# EAGLE board witch-dekatron1 (EAGLE 6.4)
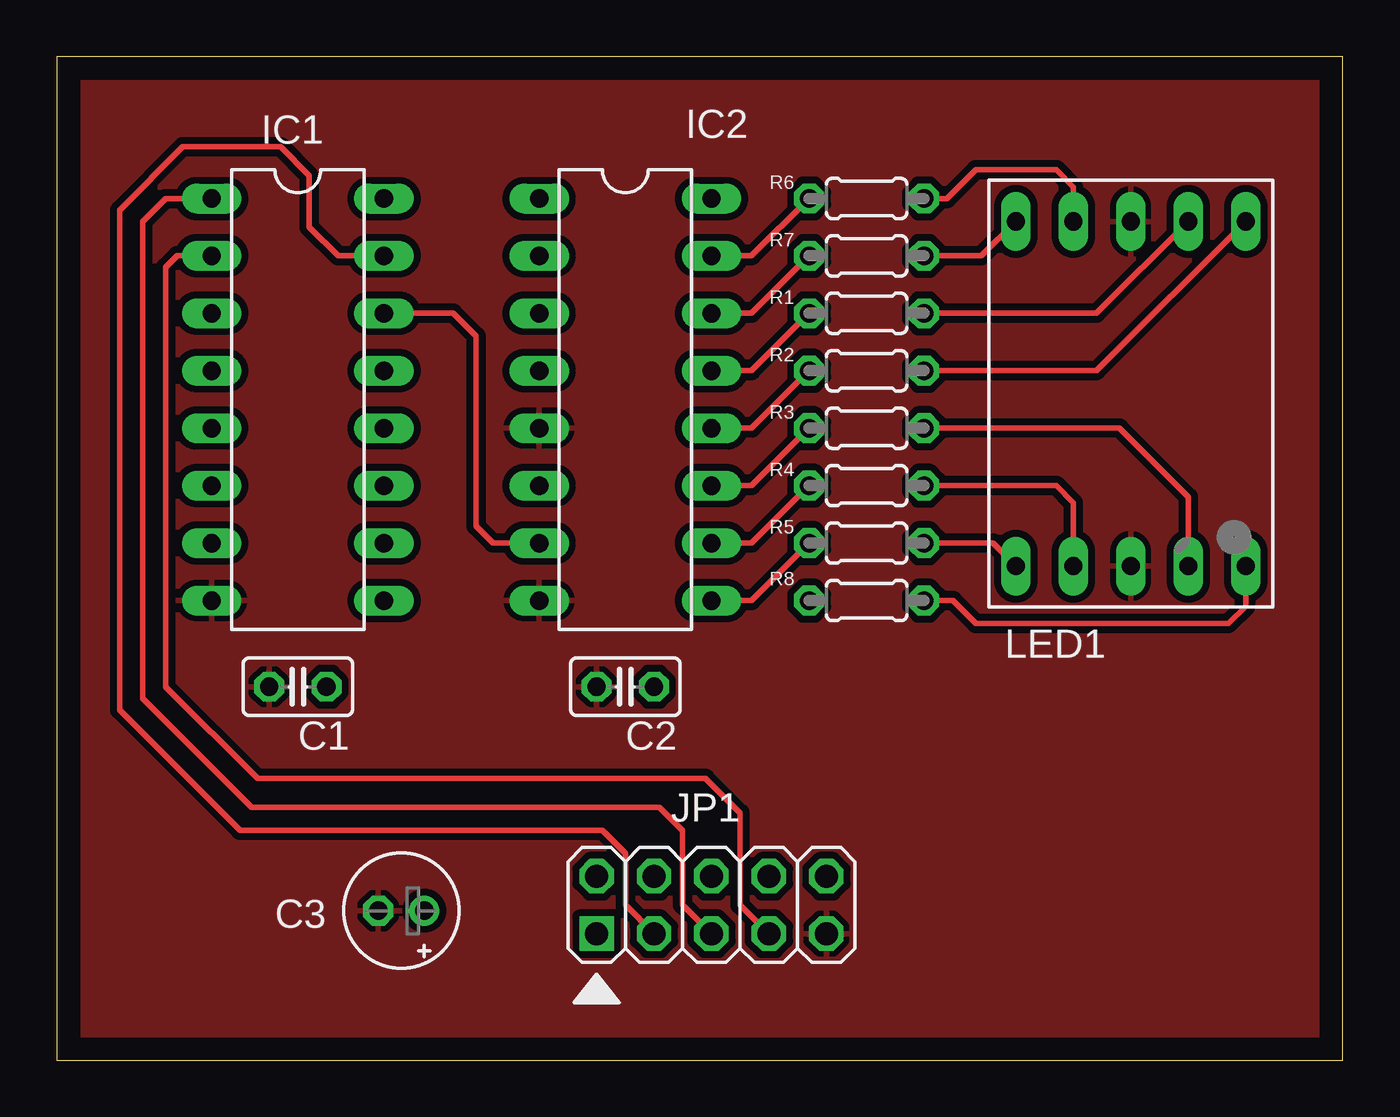
[diagram p0: board, top side]
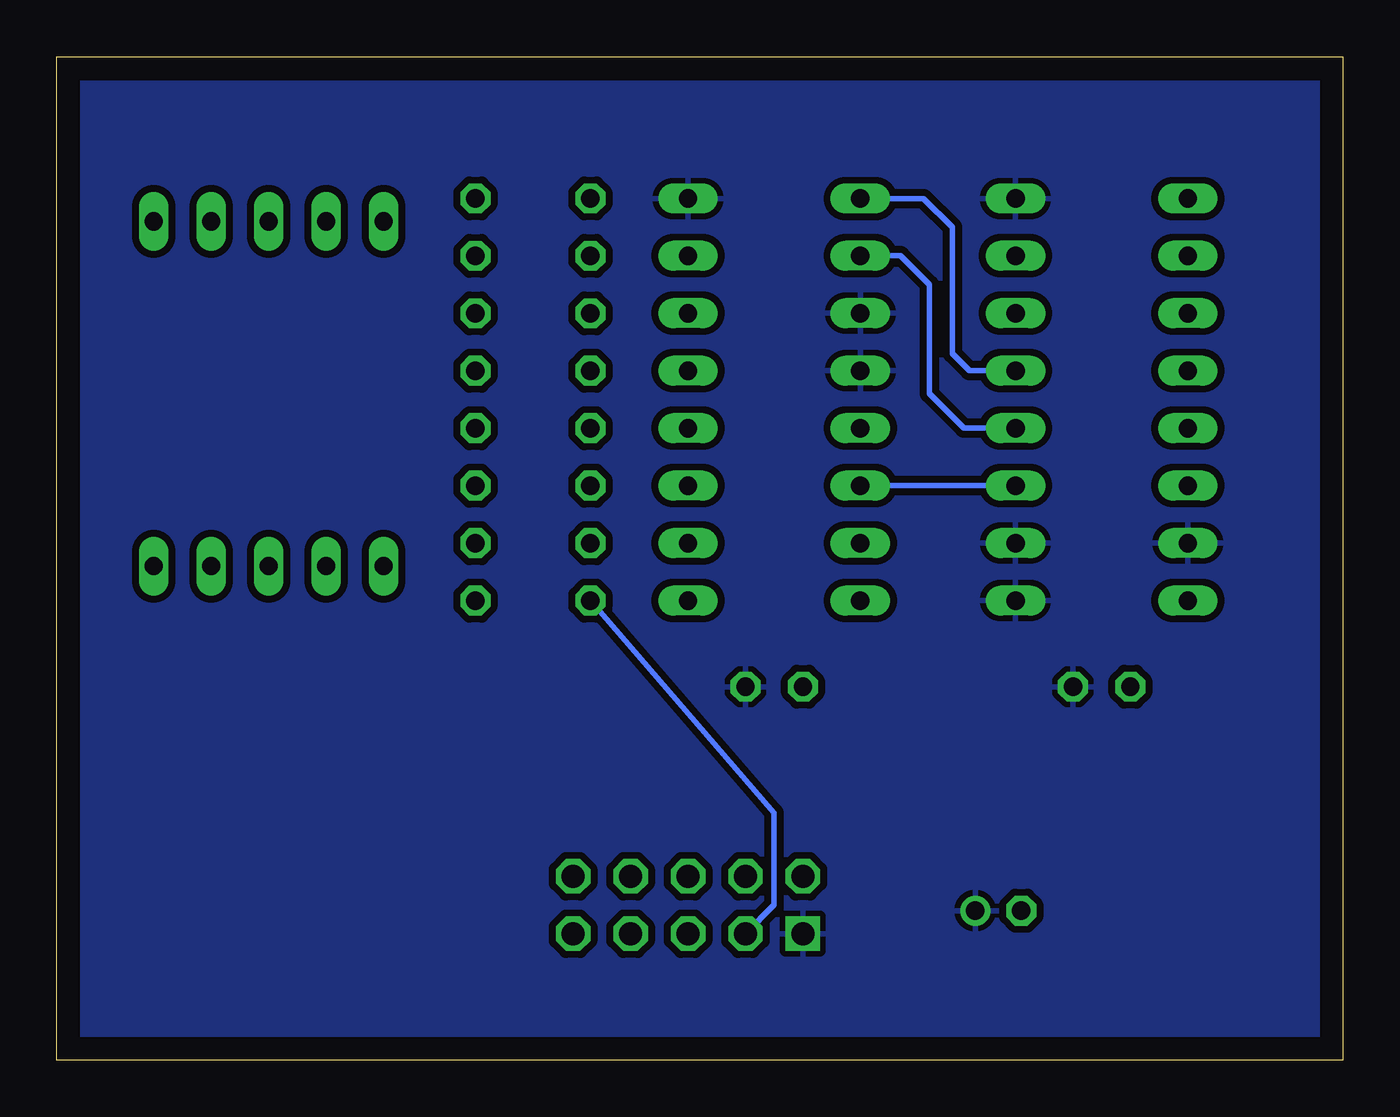
[diagram p1: board, bottom side, seen from below]

Size 56.88 x 44.37 mm. Coordinates in mm from the lower left corner, seen from the top.
Outline: 0,0 56.88,0 56.88,44.37 0,44.37 0,0
Copper layers (1*16): Top 0.035mm / dielectric 1.5mm / Bottom 0.035mm
Design rules "default": minimum track width 10mil, minimum drill 24mil, track to track 8mil, track to pad 8mil, pad to pad 8mil, via to via 8mil, smd to smd 8mil, copper to edge 40mil, drill to drill 8mil, minimum pad ring 10mil, minimum via ring 8mil, stop-mask expansion 4mil, vias tented up to drill 0mil, thermal gap 10mil

## Footprints (pad centres in the part's own frame; a part is rotated, then mirrored left to right if it is on the bottom)
C025-025X050 = drill 0.813 octagon: 1 -1.27,0; 2 1.27,0
E2-5 = drill 0.813 pad 1.27: + -1.016,0 | drill 0.813 pad 1.27 octagon: - 1.016,0
DIL16 = drill 0.813 long: 1 -8.89,-3.81; 2 -6.35,-3.81; 3 -3.81,-3.81; 4 -1.27,-3.81; 5 1.27,-3.81; 6 3.81,-3.81; 7 6.35,-3.81; 8 8.89,-3.81; 9 8.89,3.81; 10 6.35,3.81; 11 3.81,3.81; 12 1.27,3.81; 13 -1.27,3.81; 14 -3.81,3.81; 15 -6.35,3.81; 16 -8.89,3.81
2X05 = drill 1.016 square: 1 -5.08,-1.27 | drill 1.016 octagon: 2 -5.08,1.27; 3 -2.54,-1.27; 4 -2.54,1.27; 5 0,-1.27; 6 0,1.27; 7 2.54,-1.27; 8 2.54,1.27; 9 5.08,-1.27; 10 5.08,1.27
SA56-11 = drill 0.8 long: 1 -5.08,-7.62; 2 -2.54,-7.62; 3 0,-7.62; 4 2.54,-7.62; 5 5.08,-7.62; 6 5.08,7.62; 7 2.54,7.62; 8 0,7.62; 9 -2.54,7.62; 10 -5.08,7.62
0204/5 = drill 0.813 octagon: 1 -2.54,0; 2 2.54,0

## Placement (x,y rotation side)
C1  [C025-025X050]  10.67,16.51 180 top
C2  [C025-025X050]  25.15,16.51 180 top
C3  [E2-5]  15.24,6.6 180 top
IC1  74HC160N  [DIL16]  10.67,29.21 270 top
IC2  4511N  [DIL16]  25.15,29.21 270 top
JP1  [2X05]  28.96,6.86 0 top
LED1  7-SEG_SA56-11  [SA56-11]  47.5,29.46 0 top
R1  330R  [0204/5]  35.81,33.02 0 top
R2  330R  [0204/5]  35.81,30.48 0 top
R3  330R  [0204/5]  35.81,27.94 0 top
R4  330R  [0204/5]  35.81,25.4 0 top
R5  330R  [0204/5]  35.81,22.86 0 top
R6  330R  [0204/5]  35.81,38.1 0 top
R7  330R  [0204/5]  35.81,35.56 0 top
R8  330R  [0204/5]  35.81,20.32 180 top

## Library data of the parts
C1-C3 R1-R8 = resistor
IC1 = 74xx-eu
IC2 = 45xx
JP1 = pinhead
LED1 = display-kingbright; OC_FARNELL: unknown; OC_NEWARK: unknown

## Nets
N$1: IC1.15 JP1.3 R8.2
N$2: IC1.1 JP1.5
N$3: IC2.13 R1.1
N$4: IC2.12 R2.1
N$5: IC2.11 R3.1
N$6: IC2.10 R4.1
N$7: IC2.9 R5.1
N$8: IC2.15 R6.1
N$9: IC2.14 R7.1
N$10: IC1.14 IC2.7
N$11: IC1.13 IC2.1
N$12: IC1.12 IC2.2
N$13: IC1.11 IC2.6
N$14: LED1.7 R1.2
N$15: LED1.6 R2.2
N$16: LED1.4 R3.2
N$17: LED1.2 R4.2
N$18: LED1.1 R5.2
N$19: LED1.9 R6.2
N$20: LED1.10 R7.2
N$21: LED1.5 R8.1
N$25: IC1.2 JP1.7
VDD: C1.1 C2.1 C3.+ IC1.7 IC1.9 IC1.10 IC1.16 IC2.3 IC2.4 IC2.16 JP1.1
VSS: C1.2 C2.2 C3.- IC1.8 IC2.5 IC2.8 JP1.9 LED1.3 LED1.8

## Tracks (layer width: path | path; a pad name or v marks a point on that pad's centre or on a via)
N$1
  Top 0.254: IC1.15 12.45,35.56 11.18,36.83 11.18,39.12 9.91,40.39 5.59,40.39 2.79,37.59 2.79,15.49 8.13,10.16 24.13,10.16 25.15,9.14 25.15,6.86 JP1.3
  Bottom 0.254: R8.2 25.15,10.92 25.15,6.86 JP1.3
N$2
  Top 0.254: IC1.1 4.83,38.1 3.81,37.08 3.81,16 8.64,11.18 26.67,11.18 27.69,10.16 27.69,6.86 JP1.5
N$3
  Top 0.254: IC2.13 30.73,30.48 R1.1
N$4
  Top 0.254: IC2.12 30.73,27.94 R2.1
N$5
  Top 0.254: IC2.11 30.73,25.4 R3.1
N$6
  Top 0.254: IC2.10 30.73,22.86 R4.1
N$7
  Top 0.254: IC2.9 30.73,20.32 R5.1
N$8
  Top 0.254: IC2.15 30.73,35.56 R6.1
N$9
  Top 0.254: IC2.14 30.73,33.02 R7.1
N$10
  Top 0.254: IC2.7 19.3,22.86 18.54,23.62 18.54,32 17.53,33.02 IC1.14
N$11
  Bottom 0.254: IC1.13 16.51,30.48 17.27,31.24 17.27,36.83 18.54,38.1 IC2.1
N$12
  Bottom 0.254: IC1.12 16.76,27.94 18.29,29.46 18.29,34.29 19.56,35.56 IC2.2
N$13
  Bottom 0.254: IC1.11 IC2.6
N$14
  Top 0.254: R1.2 45.97,33.02 LED1.7
N$15
  Top 0.254: R2.2 45.97,30.48 LED1.6
N$16
  Top 0.254: R3.2 46.99,27.94 50.04,24.89 LED1.4
N$17
  Top 0.254: R4.2 44.2,25.4 44.96,24.64 LED1.2
N$18
  Top 0.254: R5.2 41.4,22.86 LED1.1
N$19
  Top 0.254: R6.2 39.37,38.1 40.64,39.37 44.2,39.37 44.96,38.61 LED1.9
N$20
  Top 0.254: R7.2 40.89,35.56 LED1.10
N$21
  Top 0.254: R8.1 39.62,20.32 40.64,19.3 51.82,19.3 52.58,20.07 LED1.5
N$25
  Top 0.254: IC1.2 5.33,35.56 4.83,35.05 4.83,16.51 8.89,12.45 28.7,12.45 30.23,10.92 30.23,6.86 JP1.7
VDD
  pour Bottom (isolate 0.305): 0.76,43.43 55.88,43.43 55.88,0.51 0.76,0.51
VSS
  pour Top (isolate 0.305): 0.76,43.43 55.88,43.43 55.88,0.51 0.76,0.51